# Altium PCB PCB.PcbDoc
Units mm, origin at the board's own origin, x right, y up, seen from the top; angles counter-clockwise.
Board outline 53.59 x 68.71 mm, 2 copper layers (Top Layer, Bottom Layer), stack 1.571 mm thick; 57 components, 52 nets, 216 pads, 188 vias.
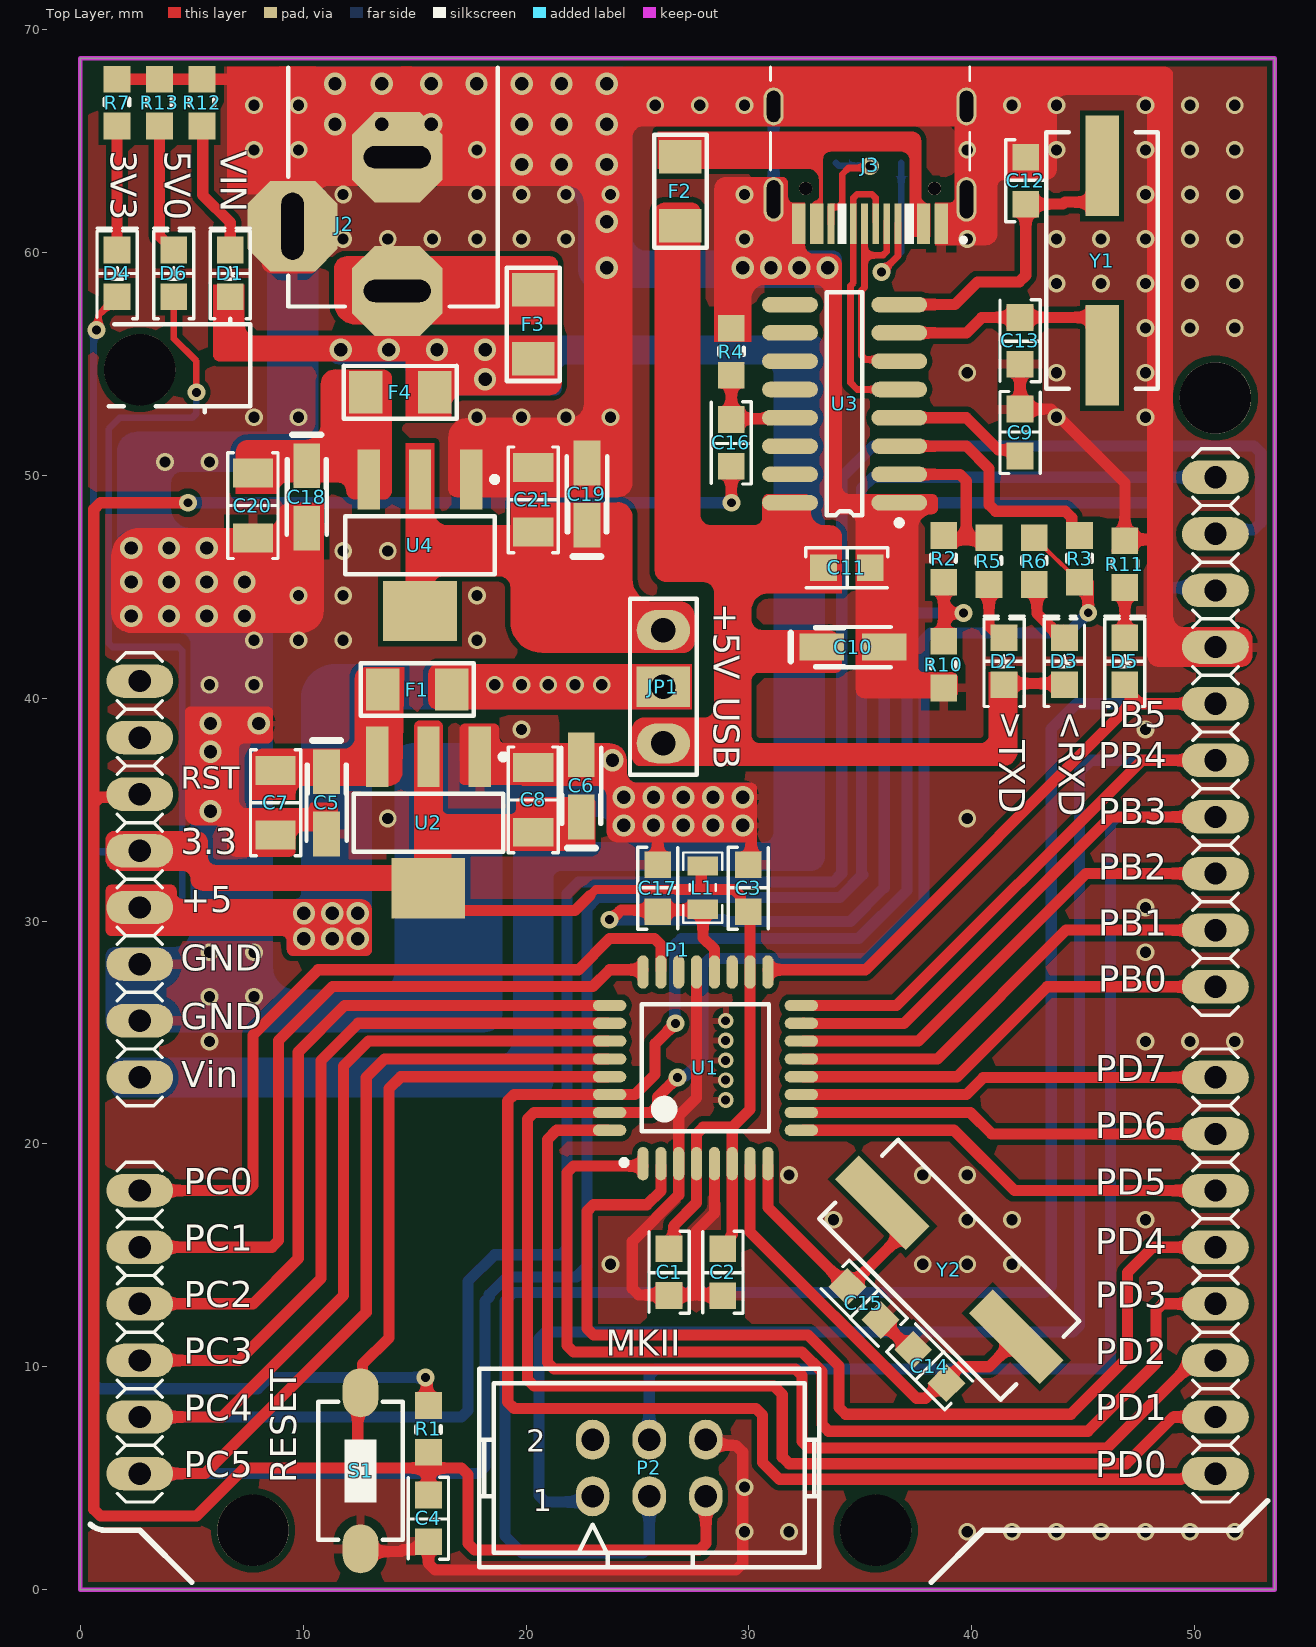
[diagram p0: Top Layer view]
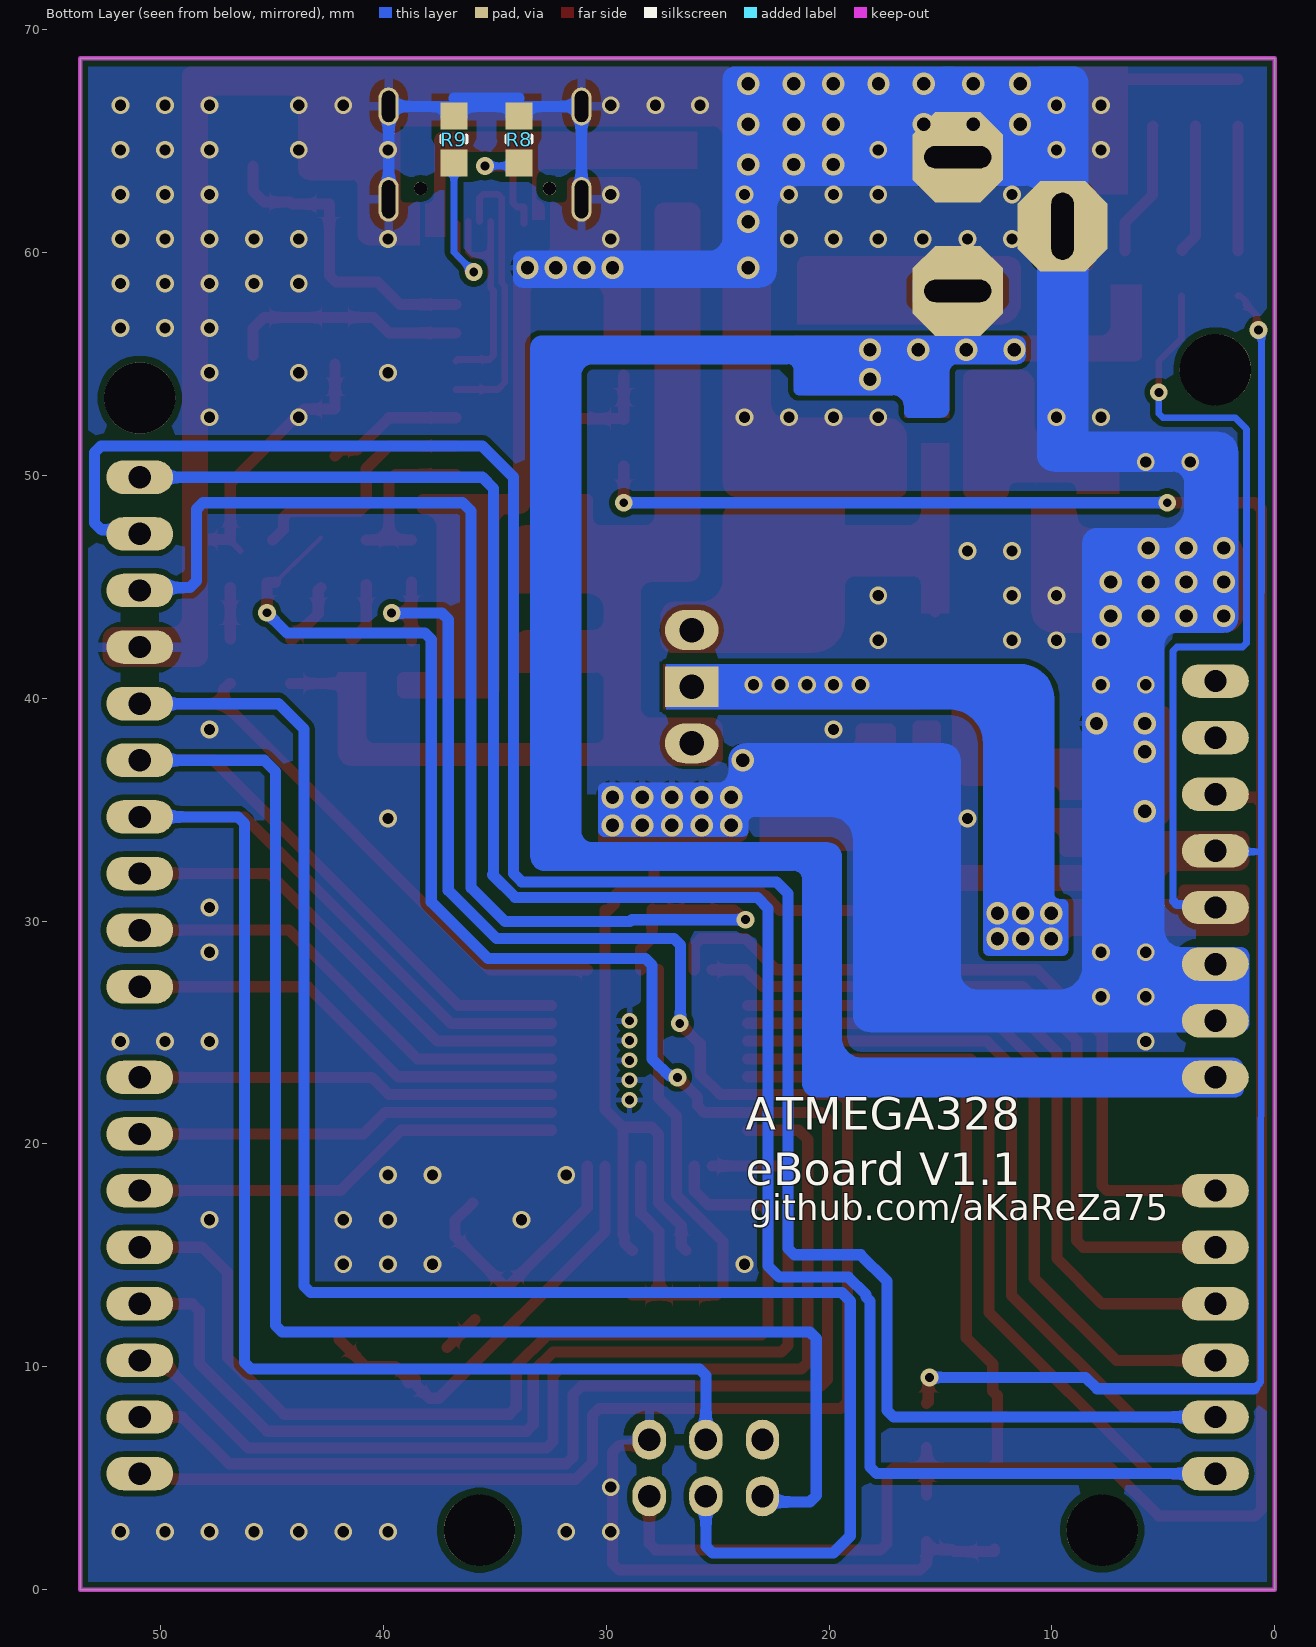
[diagram p1: Bottom Layer view, seen from below]

## Layer stack, top to bottom
Top Solder: solder mask 0.0102, Solder Resist, Dk 3.5
Top Layer: signal copper 0.0356
Dielectric 1: dielectric 1.5, FR-4, Dk 4.8
Bottom Layer: signal copper 0.0356
Bottom Solder: solder mask 0.0102, Solder Resist, Dk 3.5

## Board outline
0,0 0,68.707 53.594,68.707 53.594,0

## Design rules (kind name [scope] priority, off if disabled: settings)
AcuteAngle [All] p1: minimum=6.00000000000000E+0001 checktracksonly=TRUE
AssemblyTestPointUsage [All] p1 off:
AssemblyTestpoint [All] p1 off: testpointundercomponent=TRUE minsize=1.016 maxsize=2.54 preferedsize=1.524 minholesize=0 maxholesize=1.016 preferedholesize=0.813 testpointgrid=0.025 usegrid=TRUE gridtolerance=0 allowsidetop=TRUE allowsidebottom=TRUE
BoardOutlineClearance [All] p1: gap=0.2 ignorepadtopadclearanceinfootprint=FALSE
Clearance Poly_Clearance [All vs InPolygon] p1: gap=0.25 ignorepadtopadclearanceinfootprint=TRUE except(0.3: Arc-Hole Track-Hole SMDPad-Hole THPad-Hole Via-Hole Fill-Hole Poly-Hole Region-Hole Text-Hole)
Clearance [All] p2: gap=0.2 ignorepadtopadclearanceinfootprint=FALSE except(0.3: Arc-Hole Track-Hole SMDPad-Hole THPad-Hole Via-Hole Fill-Hole Poly-Hole Region-Hole Text-Hole)
FabricationTestPointUsage [All] p1 off: valid=0 allowmultiple=FALSE
FabricationTestpoint [All] p1 off: side=3 testpointundercomponent=TRUE minsize=1.016 maxsize=2.54 preferedsize=1.524 minholesize=0 maxholesize=1.016 preferedholesize=0.813 testpointgrid=0.025 allowsidetop=TRUE allowsidebottom=TRUE usegrid=TRUE gridtolerance=0
HoleSize [All] p1: absolutevalues=TRUE maxlimit=10 minlimit=0.4 maxpercent=80.000 minpercent=20.000
HoleToHoleClearance [All] p1: gap=0.3 allowstackedmicrovias=TRUE
MinimumAnnularRing [All] p1: minimumring=0.15
MinimumSolderMaskSliver [All] p1: minsoldermaskwidth=0.01
PolygonConnect [All] p1: thpad.connectstyle=Relief thpad.reliefconductorwidth=0.4 thpad.reliefentries=4 thpad.polygonreliefangle="90 Angle" thpad.airgapwidth=0.4 smdpad.connectstyle=Relief smdpad.reliefconductorwidth=0.4 smdpad.reliefentries=4 smdpad.polygonreliefangle="90 Angle" smdpad.airgapwidth=0.4 via.connectstyle=Direct via.reliefconductorwidth=0.254 via.reliefentries=4 via.polygonreliefangle="90 Angle" via.airgapwidth=0.254
RoutingVias [All] p1: holewidth=0.4 width=0.7 viastyle="Through Hole" minholewidth=0.4 minwidth=0.7 maxholewidth=3 maxwidth=6
SilkToSilkClearance [All] p1: silktosilkclearance=0
SilkToSolderMaskClearance [IsPad] p1: minsilkscreentomaskgap=0.01 clearancetoexposedcopper=TRUE
SolderMaskExpansion [All] p1: expansion=0.102 istentingtop=FALSE
Width [All] p1: maxlimit=10 minlimit=0.2 preferedwidth=0.3
21 further rules are at their usual default settings.

## Classes and differential pairs
component class U_USBtoTTL: C9 C10 C11 C12 C13 C16 D2 D3 F2 J3 R2 R3 R4 R5 R6 R8 R9 R10 U3 Y1
component class U_MicroController: C1 C2 C3 C4 C14 C15 C17 D5 L1 P1 P2 R1 R11 S1 U1 Y2
component class U_Supply: C5 C6 C7 C8 C18 C19 C20 C21 D1 D4 D6 F1 F3 F4 J2 JP1 R7 R12 R13 U2 U4

## Components (designator, comment, footprint, x,y, rotation, side; value= is the part's Value field where it differs from the comment)
C1 "100n" "CAP 0805/2012" 26.416,14.224 r270 top
C2 "100n" "CAP 0805/2012" 28.829,14.216 r270 top
C3 "100n" "CAP 0805/2012" 29.972,31.496 r90 top
C4 "100n" "CAP 0805/2012" 15.621,3.175 r270 top
C5 "10u" SMT_C_Tantalum_A 11.049,35.306 r270 top
C6 "22u" SMT_C_Tantalum_A 22.479,36.068 r90 top
C7 "100n" "CAP 1206/3216" 8.763,35.306 r270 top
C8 "100n" "CAP 1206/3216" 20.32,35.433 r90 top
C9 "10n" "CAP 0805/2012" 42.164,51.943 r90 top
C10 "10u" SMT_C_Tantalum_A 34.671,42.291 r0 top
C11 "100n" "CAP 0805/2012" 34.417,45.847 r0 top
C12 "22p" "CAP 0805/2012" 42.418,63.237 r90 top
C13 "22p" "CAP 0805/2012" 42.164,56.007 r270 top
C14 "22p" "CAP 0805/2012" 38.1,10.033 r135 top
C15 "22p" "CAP 0805/2012" 35.179,12.827 r315 top
C16 "100n" "CAP 0805/2012" 29.21,51.427 r270 top
C17 "100n" "CAP 0805/2012" 25.908,31.496 r90 top
C18 "10u" SMT_C_Tantalum_A 10.16,49.022 r270 top
C19 "22u" SMT_C_Tantalum_A 22.733,49.149 r90 top
C20 "100n" "CAP 1206/3216" 7.747,48.641 r270 top
C21 "100n" "CAP 1206/3216" 20.32,48.895 r90 top
D1 "Yellow" "LED 0805/2012 YELLOW" 6.731,59.055 r90 top
D2 "RED" "LED 0805/2012 RED" 41.444,41.656 r90 top value=Red
D3 "RED" "LED 0805/2012 RED" 44.154,41.656 r90 top value=Red
D4 "Green" "LED 0805/2012 GREEN" 1.651,59.055 r90 top
D5 "Green" "LED 0805/2012 GREEN" 46.863,41.656 r90 top
D6 "Red" "LED 0805/2012 RED" 4.191,59.055 r90 top
F1 "0.5A" 1206_F 15.113,40.386 r180 top
F2 "500m" 1206_F 26.924,62.738 r270 top
F3 "3A" 1206_F 20.32,56.769 r270 top
F4 "0.5A" 1206_F 14.351,53.721 r180 top
J2 "Female" "Power Jack BIG" 14.224,72.771 r270 top
J3 "12b" "HRO_TYPE-C-31-M-12 - Extended" 35.433,66.548 r180 top
JP1 "0b" "jumper selector" 26.162,43.053 r270 top
L1 "100u" IND0805 27.929,31.498 r270 top
P1 "UNO" ARDUINO_UNO_CONNECTOR 2.667,54.737 r270 top locked
P2 "3x2" IDC_2X3 25.527,5.461 r0 top
R1 "10K" "RES 0805 (2012X06L)" 15.621,6.366 r90 top
R2 "1K" "RES 0805 (2012X06L)" 38.735,47.101 r270 top
R3 "1K" "RES 0805 (2012X06L)" 44.831,47.101 r270 top
R4 "10K" "RES 0805 (2012X06L)" 29.21,56.391 r270 top
R5 "680" "RES 0805 (2012X06L)" 40.767,46.999 r270 top
R6 "680" "RES 0805 (2012X06L)" 42.799,46.999 r270 top
R7 "220b" "RES 0805 (2012X06L)" 1.651,67.564 r270 top
R8 "4.7K" "RES 0805 (2012X06L)" 33.909,65.913 r270 bottom
R9 "4.7K" "RES 0805 (2012X06L)" 36.83,65.913 r270 bottom
R10 "1.8K" "RES 0805 (2012X06L)" 38.735,40.656 r90 top
R11 "1k" "RES 0805 (2012X06L)" 46.863,46.863 r270 top value=1K
R12 "1.8k" "RES 0805 (2012X06L)" 5.461,67.564 r270 top value=1.8K
R13 "680b" "RES 0805 (2012X06L)" 3.556,67.564 r270 top
S1 "PB" SW_PB_SMD_2PIN_SPST_6X3X2 12.573,5.334 r90 top
U1 "ATmega328P" ATMEGA328 28.048,23.413 r90 top
U2 "3.3V" SOT223_M 15.621,34.417 r270 top
U3 "CH340G" SO16_M 34.29,53.213 r180 top
U4 "5V" SOT223_M 15.24,46.863 r270 top
Y1 "12M" "Crystal SMD" 45.847,59.631 r270 top
Y2 "12M" "Crystal SMD" 38.989,14.351 r135 top

## Footprints (in the part's own frame and the unit in brackets; to place one, negate y for a bottom-side part, rotate by r counter-clockwise, add the part's x,y. Pads: shape width x height; smd on the part's side, far side on the other; paste and mask are expansions set on the pad)
1206_F [mm] "Surface mount FUSE 1206"
  rect 1.5x1.9 smd: 1(-1.55,0) 2(1.55,0)
  silkscreen extent -2.54,-1.18 2.54,1.18, body extent -2.64,-1.28 2.64,1.29, height 0.71
ARDUINO_UNO_CONNECTOR [mm] "Arduino Uno Connector"
  oval 1.5x3 hole 1: AD1(36.83,0) AD2(39.37,0) AD3(41.91,0) AD4(44.45,0) AD5(46.99,0) AD6(49.53,0) IOH1(27.686,48.26) IOH2(25.146,48.26) IOH3(22.606,48.26) IOH4(20.066,48.26) IOH5(17.526,48.26) IOH6(14.986,48.26) IOH7(12.446,48.26) IOH8(9.906,48.26) IOH9(7.366,48.26) IOH10(4.826,48.26) IOL1(49.53,48.26) IOL2(46.99,48.26) IOL3(44.45,48.26) IOL4(41.91,48.26) IOL5(39.37,48.26) IOL6(36.83,48.26) IOL7(34.29,48.26) IOL8(31.75,48.26) POW1(13.97,0) POW2(16.51,0) POW3(19.05,0) POW4(21.59,0) POW5(24.13,0) POW6(26.67,0) POW7(29.21,0) POW8(31.75,0)
  round 3.2 hole 3.2: H1(0,0) H2(52.07,5.08) H3(52.07,33.02) H4(1.27,48.26)
  silkscreen extent 3.56,-2.21 54.41,50.6, body extent -1.7,-2.34 54.54,50.73, height 1.27
ATMEGA328 [mm] "Thin QFP, 32-Leads, Body 7x7mm, Pitch 0.8mm, IPC Low Density"
  oval 1.5x0.5 smd: 1(-4.301,2.8) 2(-4.301,2) 3(-4.301,1.2) 4(-4.301,0.4) 5(-4.301,-0.4) 6(-4.301,-1.2) 7(-4.301,-2) 8(-4.301,-2.8) 17(4.301,-2.8) 18(4.301,-2) 19(4.301,-1.2) 20(4.301,-0.4) 21(4.301,0.4) 22(4.301,1.2) 23(4.301,2) 24(4.301,2.8)
  oval 0.5x1.5 smd: 9(-2.8,-4.301) 10(-2,-4.301) 11(-1.2,-4.301) 12(-0.4,-4.301) 13(0.4,-4.301) 14(1.2,-4.301) 15(2,-4.301) 16(2.8,-4.301) 25(2.8,4.301) 26(2,4.301) 27(1.2,4.301) 28(0.4,4.301) 29(-0.4,4.301) 30(-1.2,4.301) 31(-2,4.301) 32(-2.8,4.301)
  silkscreen extent -4.37,-2.85 2.85,3.77, body extent -5.75,-5.75 5.75,5.75, height 1.2
"CAP 0805/2012" [mm] "Chip Capacitor, 2-Leads, Body 2.00x1.20mm, IPC Medium Density"
  rect 1.2x1.2 smd: 1(-1.075,0) 2(1.025,0)
  silkscreen extent -1.86,-0.9 1.82,0.9, body extent -1.94,-0.97 1.89,0.98, height 1.15
"CAP 1206/3216" [mm] "Chip Capacitor, 2-Leads, Body 3.25x1.60mm, IPC Medium Density"
  rect 1.3x1.8 smd: 1(-1.45,0) 2(1.45,0)
  silkscreen extent -2.37,-1.12 2.37,1.12, body extent -2.45,-1.2 2.45,1.2, height 1.6
"Crystal SMD" [mm] "DESIGNER ABBAS BASEREH"
  rect 4.5x1.5 smd: 1(-4.25,0) 2(4.25,0)
  silkscreen extent -5.75,-2.5 5.75,2.5, body extent -6.9,-2.8 6.9,2.8, height 4
"HRO_TYPE-C-31-M-12 - Extended" [mm]
  rect 0.6x1.8 smd mask+0.05: A1_B12(-3.2,5.264) A4_B9(-2.4,5.264) B1_A12(3.2,5.264) B4_A9(2.4,5.264)
  rect 0.3x1.8 smd mask+0.05: A5(-1.25,5.264) A6(-0.25,5.264) A7(0.25,5.264) B5(1.75,5.264) B6(0.75,5.264) B7(-0.75,5.264)
  oval 0.9x2 hole 0.6 slot 1.7 at 90 deg: S1(-4.325,4.17) S2(4.325,4.17)
  oval 0.9x1.7 hole 0.6 slot 1.4 at 90 deg: S3(-4.325,0) S4(4.325,0)
  round 0.6 hole 0.6 unplated: ""(-2.89,3.68) ""(2.89,3.68)
  silkscreen extent -4.47,-1.77 4.47,6.17, body extent -5.56,-2.87 9.06,6.21, height 3.26
IDC_2X3 [mm] "IDC2X3 FOR PROGPIN AND JUMPER BOX AND ETC. DESIGNER ABBAS BASEREH"
  oval 1.5x1.8 hole 1 mask+0.1: 1(-2.54,-1.27) 2(-2.54,1.27) 3(0,-1.27) 4(0,1.27) 5(2.54,-1.27) 6(2.54,1.27)
  silkscreen extent -7.62,-4.44 7.62,4.44, body extent -7.88,-4.67 7.88,4.68, height 7.62
IND0805 [mm] "Chip Inductor, 2-Leads, Body 2/00x1/25mm, IPC Medium Density DESIGNER:ABBAS BASEREH"
  rect 0.87x1.37 smd: 1(-0.97,0) 2(0.97,0)
  silkscreen extent -1.58,-0.87 1.58,0.87, body extent -1.68,-0.97 1.68,0.98, height 0.5
"jumper selector" [mm]
  oval 1.8x2.4 hole 1.1: 1(0,0) 3(5.08,0)
  rect 1.8x2.4 hole 1.1: 2(2.54,0)
  silkscreen extent -1.4,-1.5 6.48,1.5, body extent -1.5,-1.6 6.58,1.6, height 1.27
"LED 0805/2012 GREEN" [mm] "Chip Diode, 2-Leads, Body 2.00x1.25mm, IPC Medium Density"
  rect 1.2x1.2 smd: 1(-1.05,0) 2(1.05,0)
  silkscreen extent -2.03,-0.9 2.03,0.9, body extent -2.11,-0.97 2.11,0.98, height 0.7
"LED 0805/2012 RED" [mm] "Chip Diode, 2-Leads, Body 2.00x1.25mm, IPC Medium Density"
  rect 1.2x1.2 smd: 1(-1.05,0) 2(1.05,0)
  silkscreen extent -2.03,-0.9 2.03,0.9, body extent -2.11,-0.97 2.11,0.98, height 0.7
"LED 0805/2012 YELLOW" [mm] "Chip Diode, 2-Leads, Body 2.00x1.25mm, IPC Medium Density"
  rect 1.2x1.2 smd: 1(-1.05,0) 2(1.05,0)
  silkscreen extent -2.03,-0.9 2.03,0.9, body extent -2.11,-0.97 2.11,0.98, height 0.7
"Power Jack BIG" [mm] "Power Adaptor Jack"
  oct 4.05x4.05 hole 1 slot 3 at 90 deg: 1(14.5,0) 2(8.5,0)
  oct 4.05x4.05 hole 1 slot 3 at 0 deg: 3(11.6,-4.7)
  Top Layer region: 13.125,-5.7 13.625,-5.2 13.625,-4.2 13.125,-3.7 10.075,-3.7 9.575,-4.2 9.575,-5.2 10.075,-5.7
  Top Layer region: 7.5,-1.525 8,-2.025 9,-2.025 9.5,-1.525 9.5,1.525 9,2.025 8,2.025 7.5,1.525
  Top Layer region: 13.5,-1.525 14,-2.025 15,-2.025 15.5,-1.525 15.5,1.525 15,2.025 14,2.025 13.5,1.525
  Bottom Layer region: 13.125,-5.7 13.625,-5.2 13.625,-4.2 13.125,-3.7 10.075,-3.7 9.575,-4.2 9.575,-5.2 10.075,-5.7
  Bottom Layer region: 7.5,-1.525 8,-2.025 9,-2.025 9.5,-1.525 9.5,1.525 9,2.025 8,2.025 7.5,1.525
  Bottom Layer region: 13.5,-1.525 14,-2.025 15,-2.025 15.5,-1.525 15.5,1.525 15,2.025 14,2.025 13.5,1.525
  silkscreen extent 4.49,-4.9 15.2,4.5, body extent 4.39,-5.8 15.6,4.6, height 1.27
"RES 0805 (2012X06L)" [mm] "Chip Resistor, 2-Leads, Body 2.0x1.3mm, IPC High Density _ (0.100 W)"
  rect 1.2x1.2 smd: 1(-0.2,0) 2(1.9,0)
  silkscreen extent 0.67,-0.55 0.98,0.55, body extent -0.9,-0.8 2.6,0.8, height 0.65
SMT_C_Tantalum_A [mm] "Capacitor, SM Tantalum; Body 3.2 x 1.6 mm (LxW typ)"
  rect 2x1.2 smd: 1(-1.4,0) 2(1.4,0)
  silkscreen extent -2.79,-0.9 1.7,0.9, body extent -2.95,-1.07 2.59,1.07, height 1.8
SO16_M [mm] "16-Pin Small Outline Integrated Circuit 1.27 mm Pitch, IPC Low Density - DESIGNER ABBAS BASEREH"
  oval 2.5x0.7 smd: 1(-2.45,4.445) 2(-2.45,3.175) 3(-2.45,1.905) 4(-2.45,0.635) 5(-2.45,-0.635) 6(-2.45,-1.905) 7(-2.45,-3.175) 8(-2.45,-4.445) 9(2.45,-4.445) 10(2.45,-3.175) 11(2.45,-1.905) 12(2.45,-0.635) 13(2.45,0.635) 14(2.45,1.905) 15(2.45,3.175) 16(2.45,4.445)
  silkscreen extent -2.58,-5 0.8,5.47, body extent -4.25,-5.55 4.25,5.6, height 1.75
SOT223_M [mm] "SOT223, 4-Leads, Body 6.5x3.5mm, Pitch 2.3mm, Lead Span 7mm, IPC Low Density"
  rect 2.7x1 smd: 1(-2.95,2.3) 2(-2.95,0) 3(-2.95,-2.3)
  rect 2.7x3.3 smd: 4(2.95,0)
  silkscreen extent -3.07,-3.35 1.3,3.48, body extent -4.85,-3.9 4.85,3.9, height 1.7
SW_PB_SMD_2PIN_SPST_6X3X2 [mm] "SWITCH, PUSHBUTTON, SMD, SPST, 6X3.5X2.5mm, RS-282G05A3, SKQYPA, 50000 Cycles"
  oval 2.2x1.6 smd mask+0.1: 1(-3.5,0) 2(3.5,0)
  silkscreen extent -3.1,-1.9 3.1,1.9, body extent -4.7,-2 4.7,2, height 5

## Part data
C1 C2 C3 C4 C11 C16 C17: library part Cap_Multi_SMD_100nF_0805, "Bipolar ceramic capacitor SMD", Package=0805, Rating=50V, Inflow=inflow?, Type=MultiLayer, Validation=Valid
C5 C18: library part Cap_Tantalum, "Tantalum Capacitor,TAJ Series-SMD", Package=Package?, Rating=16V, Inflow=inflow?, Type=Tantalum, Validation=Valid
C6 C10 C19: library part Cap_Tantalum, "Tantalum Capacitor,TAJ Series-SMD", Package=Package?, Rating=6.3V, Inflow=inflow?, Type=Tantalum, Validation=Valid
C7 C8 C20 C21: library part Cap_Multi_SMD_100nF_1206, "Bipolar ceramic capacitor SMD", Package=1206, Rating=50V, Inflow=inflow?, Type=MultiLayer, Validation=Valid
C9 C12 C13 C14 C15: library part Cap_Multi_SMD_0805, "Bipolar ceramic capacitor SMD", Package=0805, Rating=Rating?, Inflow=inflow?, Type=MultiLayer, Validation=Valid
D1 D2 D3 D4 D5 D6: library part Semi_LED_SMD, "LED", Package=Package?, Rating=Rating?, Inflow=inflow?, Type=LED, Validation=Valid
F1 F2 F3 F4: library part Other_Elec_Fuse_SMD, "Short circiut  protection", Package=1206, Rating=Rating?, Inflow=inflow?, Type=Fast, Validation=Valid
J2: library part Con_Power_Jack, "Power Jack", Package=Package?, Rating=Rating?, Inflow=6127, Type=Type?, Validation=Valid
J3: library part Con_USB_C, "USB C Female Connector", Package=SMD, Rating=Rating?, Inflow=inflow?, Type=C, Validation=Valid
JP1: library part SW_Other_JSelector_Dip, "Jumper Selector", Package=Dip, Rating=Rating?, Inflow=5145, Type=Selector, Validation=NT
L1: library part Ind_SMD_0805, "Inductor", Package=0805, Rating=Rating?, Inflow=inflow?, Type=SMD, Validation=Valid
P1: library part Con_Arduino_UNO_Con, "Arduino UNO Connector", Package=Package?, Rating=Rating?, Inflow=inflow?, Type=Type?, Validation=NT
P2: library part Con_Prog_MKII_ISP, "6 Pin Standard ISP Header For MKII", Package=Package?, Rating=Rating?, Inflow=inflow?, Type=Type?, Validation=NT
R1 R2 R3 R4 R5 R6 R7 R8 R9 R10 R11 R12 R13: library part Res_SMD_0805, "Resistor", Package=0805, Rating=0.125W, Inflow=inflow?, Type=10%, Validation=Valid
S1: library part SW_PushButton_2_SMD, "SMT Tactile ‎Switch", Package=SMD, Rating=2b, Inflow=8260, Type=Vertical, Validation=Valid
U1: library part IC_MCU_ATmega328P_SMD, "8-Bit AVR Microcontroller with 32K Bytes of In-System Programmable Flash Memory", Package=Package?, Rating=Rating?, Inflow=inflow?, Type=Type?, Validation=Valid
U2 U4: library part IC_Reg_AMS1117_3.3, "1'A Positive voltage regulator", Package=SOT223, Rating=1A, Inflow=5217, Type=LDO, Validation=Valid
U3: library part IC_Converter_CH340G, "TTL To USB Chip", Package=SO-16, Rating=Rating?, Inflow=inflow?, Type="USB to TTL", Validation=Valid
Y1 Y2: library part Other_Elec_Xtal_SMD, "Crystal Oscillator", Package=SMD, Rating=Rating?, Inflow=inflow?, Type=Quartz, Validation=Valid

## Via types
v1: diameter 0.8, hole 0.5, Top Layer to Bottom Layer, tented both sides, 112 vias
v2: diameter 1, hole 0.6, Top Layer to Bottom Layer, tented both sides, 59 vias
v3: diameter 0.8, hole 0.4, Top Layer to Bottom Layer, tented both sides, 12 vias
v4: diameter 0.7, hole 0.4, Top Layer to Bottom Layer, tented both sides, 5 vias

## Nets (pads, with @x,y where several pads share a name; then routed paths per layer and width w, separated by ;. In a path a pad name is that pad's centre, name@x,y a point inside that pad or via, vN(x,y) a via of type N, cw(c..) or ccw(c..) an arc to the next point about the centre after c; other vN are vias at no path point)
+3.3: C1.1 C2.1 C3.1 C6.1 C8.1 D4.1 L1.1 P1.POW4 R1.2 U1.4 U1.6 U1.18 U2.2 U2.4 | length 123.9
  Top Layer w0.3: v3(0.727,56.515) 0.823,56.611 0.823,57.177 1.301,57.655 1.301,57.805 1.551,58.055 D4.1@1.651,58.055
  Top Layer w0.4: 22.864,31.147 23.138,31.421 26.674,31.421 26.681,31.413 26.752,31.413
  Top Layer w0.5: P1.POW4 4.826,33.147 ; v3(15.494,9.525) 15.551,9.468 15.551,8.436 R1.2@15.621,8.366 ; U2.4@15.621,31.417 15.621,33.909 ; U2.4 17.021,30.48 22.197,30.48 22.864,31.147 ; U2.2@15.621,37.617 15.621,33.909 ; C8.1 20.27,34.033 15.745,34.033 15.621,33.909 ; C8.1@20.364,33.983 20.414,34.033 22.186,34.033 22.479,34.326 C6.1@22.479,35.068 ; C1.1@26.416,15.224 26.632,15.44 26.632,16.345 27.648,17.361 27.648,20.453 27.941,20.746 29.248,20.746 ; 26.752,31.413 29.329,31.413 29.622,31.121 29.622,30.771 29.897,30.496 30.048,30.496 U1.18 30.048,21.546 29.248,20.746 ; 27.731,31.419 27.856,31.545 27.856,32.396 L1.1 ; C2.1@28.833,15.216 29.179,15.562 29.179,15.865 29.248,15.934 U1.6 29.248,20.746
  Bottom Layer w0.3: 0.635,9.31 0.615,33.108 0.595,56.285 0.595,56.408 0.69,56.503 v3@0.705,56.516 ; 0.645,33.108 P1.POW4@2.628,33.108 ; 0.656,9.289 0.928,9.017
  Bottom Layer w0.5: 0.928,9.017 7.98,9.017 8.488,9.525 v3(15.494,9.525) ; P1.POW4@2.628,33.108 P1.POW4
+5: D6.1 F1.1 JP1.2 P1.POW5 | length 45.9
  Top Layer w0.3: D6.1@4.191,58.055 4.191,56.134 5.207,55.118 v3(5.207,53.721)
  Top Layer w0.5: F1.1@16.513,40.386 26.035,40.386 JP1.2
  Bottom Layer w0.3: 4.572,30.901 4.572,42.115 4.396,42.291 1.446,42.291 1.27,42.467 1.27,52.07 1.766,52.566 5.032,52.591 5.207,52.766 v3(5.207,53.721)
  Bottom Layer w0.4: P1.POW5 2.8,30.74 4.393,30.74 4.553,30.901
  other v1: 18.594,40.6 19.794,40.6 20.994,40.6 22.194,40.6 23.394,40.6
  other v2: 10.033,29.21 11.303,29.21 12.446,29.21 10.033,30.353 11.303,30.353 12.446,30.353
+5R: C19.1 C21.1 JP1.1 U4.2 U4.4 | length 18.2
  Top Layer w0.5: U4.4@15.24,43.863 15.24,47.244 ; U4.2@15.24,50.063 15.24,47.244 ; 20.32,45.974 C21.1@20.32,47.241 ; C19.1 22.733,47.283 22.44,46.99 20.571,46.99 C21.1@20.32,47.241 ; 23.622,43.053 JP1.1 ; 15.24,47.244 15.243,47.241 C21.1@20.32,47.241
ADC6: U1.19
ADC7: U1.22
ARef: C17.1 L1.2 P1.IOH8 U1.20 | length 55.7
  Top Layer w0.5: v3(23.749,30.06) 23.83,30.06 24.258,30.488 25.9,30.488 25.908,30.496 27.897,30.496 L1.2 27.94,30.518 27.94,29.246 28.448,28.738 U1.20@28.448,27.813
  Bottom Layer w0.5: v3(23.749,30.06) 28.845,30.06 28.933,29.972 34.544,29.972 36.068,31.496 36.068,48.387 36.449,48.768 48.094,48.768 48.387,48.475 48.387,45.251 48.68,44.958 50.8,44.958 P1.IOH8
GND: C1.2 C2.2 C3.2 C4.2 C5.2 C6.2 C7.2 C8.2 C9.2 C10.2 C11.2 C12.2 C13.2 C14.2 C15.2 C17.2 C18.2 C19.2 C20.2 C21.2 J2.2 J2.3 J3.A1_B12 J3.B1_A12 J3.S1 J3.S2 J3.S3 J3.S4 P1.IOH7 P1.POW6 P1.POW7 P2.6 R4.1 R7.1 R8.1 R9.1 R10.1 R11.1 R12.1 R13.1 S1.1 U1.3 U1.5 U1.21 U2.1 U3.1 U4.1 | length 152.5
  Top Layer w0.3: R11.1@46.413,46.613 R11.1 R11.1@46.863,47.101
  Top Layer w0.5: R7.1 R13.1 R12.1 6.931,67.764 7.239,68.072 ; 7.342,63.373 7.342,65.405 ; 7.342,67.437 7.342,65.405 ; C7.2 8.763,33.871 9.671,34.779 9.671,34.814 9.702,34.783 10.699,34.783 10.699,34.738 11.049,34.388 C5.2 ; J2.3 9.524,65.279 9.398,65.405 ; S1.1 12.573,1.707 14.397,1.707 14.49,1.8 15.271,1.8 C4.2 15.621,1.182 15.914,0.889 29.425,0.889 29.718,1.182 29.718,6.184 29.425,6.477 28.067,6.477 P2.6 ; J2.2 12.949,64.271 12.325,64.895 12.198,64.895 12.141,64.952 12.141,64.978 11.848,65.271 11.848,65.278 10.922,65.278 10.795,65.405 9.398,65.405 ; U4.1@17.54,50.063 17.647,50.169 20.32,50.169 20.496,50.345 22.529,50.345 C19.2 ; U2.1@17.921,37.617 17.921,37.299 17.97,37.25 19.953,37.25 C8.2 20.412,36.975 22.386,36.975 C6.2@22.479,37.068 ; C17.2@25.908,32.496 25.908,33.616 26.201,33.909 29.806,33.909 30.099,33.616 30.099,32.623 C3.2@29.972,32.496 ; U1.21@27.648,27.813 27.648,22.06 26.848,21.26 26.848,17.704 24.765,15.621 24.765,13.517 25.058,13.224 26.416,13.224 26.42,13.22 27.622,13.22 ; U1.5@28.448,19.013 28.448,16.891 27.622,16.066 27.622,13.22 ; C2.2@28.829,13.216 28.825,13.22 27.622,13.22 ; C11.2 C11.2@35.817,45.847 ; C15.2@35.886,12.12 C14.2@37.139,10.867 ; C10.2 35.817,42.545 C11.2@35.817,45.847 ; U3.1 35.909,48.768 35.817,48.676 C11.2@35.817,45.847 ; J3.A1_B12@38.633,61.384 38.633,61.01 38.683,60.96 39.458,60.96 39.681,61.183 39.681,62.301 J3.S1 v1@39.758,64.262 ; J3.S3 v1@39.758,64.262 ; C13.2 C9.2 43.552,52.968 46.863,49.657 46.863,47.101 46.879,47.117 48.348,47.117 48.641,46.824 48.641,42.711 48.934,42.418 50.8,42.418 P1.IOH7 ; C12.2 v1@39.758,64.262 ; 7.342,65.405 9.398,65.405
  Bottom Layer w0.5: J3.S2 J3.S4 J3.S3 J3.S1 ; 33.909,66.913 36.83,66.913
  other v1: 29.794,2.6 31.794,2.6 39.794,2.6 41.794,2.6 43.794,2.6 45.794,2.6 47.794,2.6 49.794,2.6 51.794,2.6 29.794,4.6 23.794,14.6 37.794,14.6 39.794,14.6 41.794,14.6 33.794,16.6 39.794,16.6 41.794,16.6 47.794,16.6 31.794,18.6 37.794,18.6 39.794,18.6 5.794,24.6 47.794,24.6 49.794,24.6 51.794,24.6 5.794,26.6 7.794,26.6 5.794,28.6 7.794,28.6 47.794,28.6 47.794,30.6 13.794,34.6 39.794,34.6 19.794,38.6 47.794,38.6 5.794,40.6 7.794,40.6 7.794,42.6 9.794,42.6 11.794,42.6 17.794,42.6 9.794,44.6 11.794,44.6 17.794,44.6 11.794,46.6 13.794,46.6 3.794,50.6 5.794,50.6 7.794,52.6 9.794,52.6 17.794,52.6 19.794,52.6 21.794,52.6 23.794,52.6 43.794,52.6 47.794,52.6 39.794,54.6 43.794,54.6 47.794,54.6 47.794,56.6 49.794,56.6 51.794,56.6 43.794,58.6 45.794,58.6 47.794,58.6 49.794,58.6 51.794,58.6 11.794,60.6 13.794,60.6 15.794,60.6 17.794,60.6 19.794,60.6 21.794,60.6 29.794,60.6 39.794,60.6 43.794,60.6 45.794,60.6 47.794,60.6 49.794,60.6 51.794,60.6 11.794,62.6 17.794,62.6 19.794,62.6 21.794,62.6 23.794,62.6 29.794,62.6 47.794,62.6 49.794,62.6 51.794,62.6 7.794,64.6 9.794,64.6 17.794,64.6 39.794,64.6 43.794,64.6 47.794,64.6 49.794,64.6 51.794,64.6 7.794,66.6 9.794,66.6 25.794,66.6 27.794,66.6 29.794,66.6 41.794,66.6 43.794,66.6 47.794,66.6 49.794,66.6 51.794,66.6
  other v2: 24.384,34.29 25.717,34.29 27.051,34.29 28.384,34.29 29.718,34.29 5.842,34.925 24.384,35.56 25.717,35.56 27.051,35.56 28.384,35.56 29.718,35.56 23.876,37.211 5.842,37.592 5.842,38.862 8.001,38.862 2.286,43.688 3.979,43.688 5.673,43.688 7.366,43.688 2.286,45.212 3.979,45.212 5.673,45.212 7.366,45.212 2.286,46.736 3.979,46.736 5.673,46.736 23.622,59.309 29.718,59.309 30.988,59.309 32.258,59.309 33.528,59.309 23.622,61.373 19.812,63.944 21.59,63.944 23.622,63.944 11.43,65.754 13.525,65.754 15.748,65.754 19.812,65.754 21.59,65.754 23.622,65.754 11.43,67.564 13.525,67.564 15.748,67.564 17.78,67.564 19.812,67.564 21.59,67.564 23.622,67.564
  other v4: 28.956,21.971 28.956,22.86 28.956,23.749 28.956,24.638 28.956,25.527
NetC5_1: C5.1 C7.1 F1.2 U2.3 | length 8.3
  Top Layer w0.5: C7.1 10.999,36.756 C5.1 11.049,36.579 12.748,36.579 13.321,37.152 13.321,37.617 13.417,37.713 13.417,40.09 F1.2@13.713,40.386
NetC9_1: C9.1 U3.4 | length 6.1
  Top Layer w0.5: U3.4 39.751,52.578 41.182,51.147 41.885,51.147 C9.1
NetC12_1: C12.1 U3.8 Y1.1 | length 14.2
  Top Layer w0.5: U3.8 37.344,57.658 39.243,57.658 40.259,58.674 42.125,58.674 42.418,58.967 C12.1 44.097,62.162 44.188,62.253 45.347,62.253 45.847,62.753 Y1.1
NetC13_1: C13.1 U3.7 Y1.2 | length 10.8
  Top Layer w0.5: U3.7 37.344,56.388 39.751,56.388 40.445,57.082 C13.1 45.347,57.082 45.847,56.582 Y1.2
NetC16_1: C16.1 R4.2 U3.13 | length 4.6
  Top Layer w0.5: R4.2 C16.1 29.248,52.54 31.802,52.54 U3.13
NetC18_1: C18.1 C20.1 F4.2 U4.3 | length 9.6
  Top Layer w0.5: C20.1 7.924,50.091 9.829,50.091 C18.1 10.16,50.052 12.929,50.052 U4.3@12.94,50.063 ; U4.3 U4.3@12.94,50.063 ; F4.2@12.951,53.721 12.946,53.716 12.946,50.069 U4.3@12.94,50.063
NetD1_2: D1.2 R12.2 | length 6.1
  Top Layer w0.5: R12.2 5.492,65.633 5.492,62.58 6.731,61.341 D1.2@6.731,60.055
NetD2_2: D2.2 R5.2 | length 2.8
  Top Layer w0.5: R5.2 40.767,44.963 40.767,43.233 41.344,42.656 D2.2@41.444,42.656
NetD3_2: D3.2 R6.2 | length 2.9
  Top Layer w0.5: R6.2@42.799,44.963 42.915,44.847 42.915,43.794 44.054,42.656 D3.2@44.154,42.656
NetD4_2: D4.2 R7.2 | length 5.6
  Top Layer w0.5: D4.2@1.651,60.055 R7.2
NetD5_2: D5.2 R11.2 | length 2.3
  Top Layer w0.5: D5.2@46.863,42.656 R11.2
NetD6_2: D6.2 R13.2 | length 5.8
  Top Layer w0.5: R13.2 3.556,60.74 4.154,60.142 D6.2@4.154,60.092
NetF2_1: F2.1 J3.A4_B9 J3.B4_A9
NetF3_1: F3.1 J2.1 | length 6.1
  Top Layer w0.5: J2.1 14.28,58.215 20.274,58.215 F3.1@20.32,58.169
NetJ3_A5: J3.A5 R9.2 | length 7.8
  Top Layer w0.3: v3(35.941,59.116) 35.964,59.116 36.683,59.834 J3.A5
  Bottom Layer w0.3: v3(35.941,59.116) 36.83,60.005 R9.2
NetJ3_A6: J3.A6 J3.B6 U3.5 | length 12.8
  Top Layer w0.3: J3.A6@35.683,61.384 35.683,62.435 35.507,62.611 34.859,62.611 34.683,62.435 34.683,58.631 34.552,58.5 34.552,54.155 34.859,53.848 U3.5
NetJ3_A7: J3.A7 J3.B7 U3.6 | length 10.3
  Top Layer w0.3: J3.A7@35.183,61.384 35.183,59.866 ; 35.993,59.866 35.183,59.866 ; 35.994,59.866 35.997,59.867 36,59.868 36.004,59.87 36.009,59.873 36.016,59.877 36.025,59.884 36.04,59.898 36.183,60.041 J3.B7@36.183,61.384 ; U3.6 36.663,55.195 35.228,55.195 35.052,55.37 35.052,58.293 35.183,58.424 35.183,59.866
NetJ3_B5: J3.B5 R8.2 | length 5.6
  Top Layer w0.3: J3.B5 33.683,62.034 34.007,62.034 34.183,62.209 34.183,63.503 34.466,63.785 35.337,63.785 v3(35.433,63.881)
  Bottom Layer w0.3: R8.2 34.041,63.881 v3(35.433,63.881)
NetR2_1: R2.1 R5.1 U3.2 | length 7.8
  Top Layer w0.5: U3.2 37.344,50.038 39.458,50.038 39.751,49.745 39.751,47.101 ; R2.1@38.735,47.101 39.751,47.101 ; R5.1@40.767,47.101 39.751,47.101
NetR3_1: R3.1 U3.3 | length 11.2
  Top Layer w0.5: U3.3 37.344,51.308 39.751,51.308 40.767,50.292 40.767,48.68 41.06,48.387 44.188,48.387 44.481,48.094 44.481,47.566 R3.1@44.958,47.089
PB0: P1.IOH1 U1.12 | length 20.2
  Top Layer w0.5: U1.12@32.448,23.013 39.338,23.013 43.376,27.051 P1.IOH1
PB1: P1.IOH2 U1.13 | length 20.9
  Top Layer w0.5: U1.13@32.448,23.813 38.456,23.813 44.234,29.591 P1.IOH2
PB2: P1.IOH3 U1.14 | length 21.6
  Top Layer w0.5: U1.14@32.448,24.613 37.598,24.613 45.116,32.131 P1.IOH3
PB3: P1.IOH4 P2.4 U1.15 | length 75.1
  Top Layer w0.5: U1.15@32.448,25.413 32.461,25.4 36.957,25.4 46.228,34.671 P1.IOH4
  Bottom Layer w0.5: P2.4 25.527,9.613 25.82,9.906 45.935,9.906 46.228,10.199 46.228,34.378 46.521,34.671 P1.IOH4
PB4: P1.IOH5 P2.1 U1.16 | length 88.4
  Top Layer w0.5: U1.16@32.448,26.213 36.627,26.213 47.625,37.211 P1.IOH5
  Bottom Layer w0.5: P2.1 22.733,3.937 20.867,3.937 20.574,4.23 20.574,11.264 20.867,11.557 44.538,11.557 44.831,11.85 44.831,36.703 45.339,37.211 P1.IOH5
PB5: D5.1 P1.IOH6 P2.3 U1.17 | length 103.4
  Top Layer w0.5: U1.17@30.848,27.813 35.218,27.813 47.156,39.751 ; D5.1@46.863,40.656 46.906,40.656 47.156,40.406 47.156,39.751 ; P1.IOH6 47.156,39.751
  Bottom Layer w0.5: P2.3 25.527,3.937 25.527,1.944 25.234,1.651 19.812,1.651 19.05,2.413 19.05,12.954 19.431,13.335 43.268,13.335 43.561,13.628 43.561,38.608 44.704,39.751 P1.IOH6
PB6: C14.1 U1.7 Y2.1 | length 19.5
  Top Layer w0.5: U1.7@30.048,19.013 30.048,16.053 37.512,8.589 37.926,8.589 38.553,9.216 38.553,9.453 C14.1@38.907,9.453 ; C14.1 38.907,9.319 C14.1@38.907,9.453 ; Y2.1 41.994,11.223 40.773,10.001 39.455,10.001 C14.1@38.907,9.453
PB7: C15.1 U1.8 Y2.2 | length 12.1
  Top Layer w0.5: U1.8@30.848,19.013 30.848,17.158 34.472,13.534 36.785,15.848 36.785,16.555 Y2.2
PC0: P1.AD1 U1.23 | length 33.2
  Top Layer w0.5: P1.AD1 7.524,17.907 7.747,18.13 7.747,24.892 10.668,27.813 22.352,27.813 23.749,29.21 25.755,29.21 26.048,28.917 U1.23@26.048,27.813
PC1: P1.AD2 U1.24 | length 33
  Top Layer w0.5: P1.AD2 8.597,15.367 8.89,15.66 8.89,24.638 11.307,27.055 22.991,27.055 23.749,27.813 U1.24@25.248,27.813
PC2: P1.AD3 U1.25 | length 32
  Top Layer w0.5: P1.AD3 7.747,12.827 9.779,14.859 9.779,24.13 11.862,26.213 U1.25@23.648,26.213
PC3: P1.AD4 U1.26 | length 33
  Top Layer w0.5: P1.AD4 7.112,10.287 10.795,13.97 10.795,23.749 12.459,25.413 U1.26@23.648,25.413
PC4: P1.AD5 P1.IOH9 U1.27 | length 131
  Top Layer w0.5: P1.AD5 6.35,7.747 11.811,13.208 11.811,23.495 12.929,24.613 U1.27@23.648,24.613
  Bottom Layer w0.5: P1.AD5 17.106,7.747 17.399,8.04 17.399,13.843 18.581,15.025 21.551,15.025 21.844,15.318 21.844,31.242 22.352,31.75 33.787,31.75 34.163,32.126 34.163,49.911 35.56,51.308 52.666,51.308 52.959,51.015 52.959,47.855 52.666,47.562 51.118,47.562 P1.IOH9
PC5: P1.AD6 P1.IOH10 U1.28 | length 125.6
  Top Layer w0.5: P1.AD6 5.588,5.207 12.827,12.446 12.827,22.987 13.653,23.813 U1.28@23.648,23.813
  Bottom Layer w0.5: P1.AD6 17.868,5.207 18.161,5.5 18.161,12.952 18.35,13.141 18.35,13.244 19.141,14.035 22.251,14.035 22.733,14.517 22.733,30.568 23.215,31.05 34.077,31.05 35.104,32.077 ; 35.052,32.129 35.052,49.405 35.558,49.911 P1.IOH10
PD0: P1.IOL1 R2.2 R10.2 U1.30 | length 91.1
  Top Layer w0.5: v3(26.701,25.411) 25.781,24.491 25.781,23.114 24.88,22.213 23.648,22.213 19.47,22.213 19.177,21.92 19.177,8.421 19.47,8.128 30.314,8.128 30.607,7.835 30.607,5.715 31.369,4.953 49.384,4.953 49.447,5.016 50.736,5.016 P1.IOL1 ; R10.2 38.735,43.815 ; R2.2 38.735,43.815 ; v3(39.624,43.815) 38.735,43.815
  Bottom Layer w0.5: v3(26.701,25.411) 26.67,25.442 26.67,28.917 26.963,29.21 34.925,29.21 37.084,31.369 37.084,43.522 37.377,43.815 v3(39.624,43.815)
PD1: P1.IOL2 R3.2 R6.1 U1.31 | length 95.4
  Top Layer w0.2: R6.1 43.299,46.699 44.331,45.701 R3.2
  Top Layer w0.5: v3(26.797,22.987) 25.908,22.098 25.908,21.717 25.604,21.413 20.359,21.413 20.066,21.12 20.066,9.437 20.359,9.144 31.115,9.144 31.496,8.763 31.496,5.946 31.789,5.653 46.928,5.653 49.022,7.747 P1.IOL2 ; R3.2 44.836,45.196 45.221,45.196 v3(45.221,43.83)
  Bottom Layer w0.5: v3(26.797,22.987) 26.854,23.044 27.165,23.044 27.94,23.819 27.94,28.028 28.233,28.321 35.306,28.321 37.846,30.861 37.846,42.633 38.139,42.926 44.317,42.926 v3(45.221,43.83)
PD2: P1.IOL3 U1.32 | length 47.8
  Top Layer w0.5: U1.32@23.648,20.613 21.375,20.613 20.955,20.193 20.955,10.199 21.248,9.906 32.092,9.906 32.385,9.613 32.385,6.646 32.678,6.353 46.065,6.353 49.999,10.287 P1.IOL3
PD3: P1.IOL4 U1.1 | length 47.1
  Top Layer w0.5: U1.1@25.248,19.013 22.137,19.013 21.844,18.72 21.844,10.961 22.137,10.668 32.385,10.668 33.274,9.779 33.274,7.405 33.567,7.112 45.212,7.112 48.26,10.16 48.26,12.534 48.553,12.827 P1.IOL4
PD4: P1.IOL5 U1.2 | length 46.3
  Top Layer w0.5: U1.2@26.048,19.013 26.048,17.894 25.426,17.272 23.026,17.272 22.733,16.979 22.733,11.723 23.026,11.43 32.639,11.43 34.036,10.033 34.036,8.167 34.329,7.874 44.45,7.874 46.99,10.414 46.99,14.224 48.133,15.367 P1.IOL5
PD5: P1.IOL6 U1.9 | length 19.6
  Top Layer w0.5: U1.9@32.448,20.613 39.204,20.613 41.91,17.907 P1.IOL6
PD6: P1.IOL7 U1.10 | length 18.9
  Top Layer w0.5: U1.10@32.448,21.413 39.928,21.413 40.894,20.447 P1.IOL7
PD7: P1.IOL8 U1.11 | length 18.8
  Top Layer w0.5: U1.11@32.448,22.213 32.46,22.225 39.751,22.225 40.513,22.987 P1.IOL8
Reset: C4.1 C16.2 P1.POW3 P2.5 R1.1 S1.2 U1.29 | length 141.4
  Top Layer w0.5: P1.POW3 2.54,35.56 0.899,35.56 0.606,35.267 ; v3(4.826,48.768) 0.899,48.768 0.606,48.475 0.606,35.267 ; C4.1 15.621,5.461 ; R1.1@15.621,6.366 15.621,5.461 ; U1.29@23.648,23.013 14.377,23.013 13.843,22.479 13.843,11.303 12.656,10.116 12.656,8.917 S1.2 12.446,8.707 12.446,5.754 12.739,5.461 ; P2.5 28.067,3.937 28.067,2.071 27.774,1.778 17.692,1.778 17.399,2.071 17.399,5.168 17.106,5.461 15.621,5.461 ; v3(29.21,48.768) C16.2 ; 0.606,35.267 0.606,3.595 0.899,3.302 5.207,3.302 7.366,5.461 12.739,5.461 ; 12.739,5.461 15.621,5.461
  Bottom Layer w0.5: v3(4.826,48.768) v3(29.21,48.768)
Vin: D1.1 F3.2 F4.1 P1.POW8
  other v2: 18.161,54.31 11.684,55.626 13.843,55.626 16.002,55.626 18.161,55.626
Vusb: C10.1 C11.1 D2.1 D3.1 F2.2 JP1.3 U3.16 | length 33.9
  Top Layer w0.5: JP1.3 29.425,37.973 29.718,38.266 29.718,41.49 29.591,41.617 29.591,45.3 29.884,45.593 32.636,45.593 C11.1@33.017,45.974 ; F2.2@26.924,61.338 26.797,61.211 26.924,61.084 26.924,48.172 27.217,47.879 ; 30.392,42.164 30.646,42.418 33.144,42.418 C10.1 ; D2.1@41.444,40.656 D3.1@44.154,40.656
pads on no net: J3. P1.H1 P1.H2 P1.H3 P1.H4 P1.POW1 P1.POW2 P2.2 U3.9 U3.10 U3.11 U3.12 U3.14 U3.15

## Polygon pours and split planes (outlines as drawn)
GND on Bottom Layer "GND_L02_P002" (solid, remove dead copper, pour order 2): 53.332,68.317 0.16,68.317 0.16,-0.009 53.586,-0.009
GND on Top Layer "GND_L01_P000" (solid, remove dead copper, pour order 0): 53.34,68.326 0.168,68.326 0.168,0 53.594,0

## Keep-outs
Keep-Out Layer:
  the board outline again, w0.2

## Other copper
Top Layer:
  region net NetF2_1: 33.655,64.516 36.83,64.516 cw(c36.83,64.135) 37.211,64.135 37.211,60.706 38.123,60.706 38.123,62.173 cw(c38.123,62.577) 37.719,62.577 37.719,65.024 ccw(c37.338,65.024) 37.338,65.405 25.908,65.405 25.908,63.754 32.639,63.754 cw(c32.639,63.246) 33.147,63.246 33.147,62.484 cw(c32.999,62.484) 33.04,62.342 ccw(c33.147,61.976) 32.766,61.976 32.766,61.462 33.318,61.462 33.318,64.179 cw(c33.655,64.179)
  region net GND: 44.196,67.056 47.371,67.056 cw(c47.371,66.548) 47.879,66.548 47.879,41.91 ccw(c48.387,41.91) 48.387,41.402 52.07,41.402 ccw(c52.07,41.91) 52.578,41.91 52.578,42.672 ccw(c52.07,42.672) 52.07,43.18 49.53,43.18 cw(c49.53,43.688) 49.022,43.688 49.022,67.945 ccw(c48.641,67.945) 48.641,68.326 6.604,68.326 6.604,62.611 8.128,62.611 8.128,59.563 ccw(c8.636,59.563) 8.636,59.055 10.287,59.055 ccw(c10.287,59.436) 10.668,59.436 10.668,62.484 cw(c11.176,62.484) 11.176,62.992 21.209,62.992 21.844,62.992 cw(c21.844,62.23) 22.606,62.23 22.606,53.213 cw(c21.971,53.213) 21.971,52.578 17.399,52.578 ccw(c17.399,51.689) 16.51,51.689 16.51,49.403 ccw(c16.891,49.403) 16.891,49.022 24.13,49.022 ccw(c24.13,49.657) 24.765,49.657 24.765,65.151 cw(c25.273,65.151) 25.273,65.659 39.243,65.659 39.243,62.484 cw(c38.989,62.484) 38.989,62.23 38.354,62.23 38.354,60.325 40.64,60.325 ccw(c40.64,60.833) 41.148,60.833 41.148,62.992 cw(c41.402,62.992) 41.402,63.246 43.307,63.246 ccw(c43.307,63.754) 43.815,63.754 43.815,66.675 cw(c44.196,66.675)
  region net GND: 4.699,34.798 ccw(c5.207,34.798) 5.207,34.29 6.096,34.29 cw(c6.096,33.782) 6.604,33.782 6.604,33.274 ccw(c6.985,33.274) 6.985,32.893 9.398,32.893 ccw(c9.398,33.147) 9.652,33.147 9.652,33.655 cw(c10.033,33.655) 10.033,34.036 11.303,34.036 ccw(c11.303,34.29) 11.557,34.29 11.557,35.052 ccw(c11.295,35.052) 11.295,35.314 10.422,35.314 ccw(c10.422,35.189) 10.296,35.188 cw(c10.16,35.188) 10.16,35.052 7.493,35.052 cw(c7.493,35.433) 7.112,35.433 7.112,37.719 cw(c7.366,37.719) 7.366,37.973 8.382,37.973 ccw(c8.382,38.227) 8.636,38.227 8.636,39.37 ccw(c8.382,39.37) 8.382,39.624 4.953,39.624 ccw(c4.953,39.37) 4.699,39.37
  region net GND: 10.922,48.76 10.922,43.942 cw(c9.906,43.942) 9.906,42.926 2.286,42.926 cw(c2.286,43.815) 1.397,43.815 1.397,46.355 cw(c2.667,46.355) 2.667,47.625 8.255,47.625 ccw(c8.255,48.244) 8.874,48.244 cw(c9.39,48.244) 9.39,48.76
  region net +5: 1.143,29.591 ccw(c1.397,29.591) 1.397,29.337 9.017,29.337 cw(c9.017,29.083) 9.271,29.083 ccw(c9.652,29.083) 9.273,29.045 9.271,29.045 9.271,28.702 ccw(c9.525,28.702) 9.525,28.448 12.827,28.448 ccw(c12.827,28.702) 13.081,28.702 13.081,30.48 ccw(c12.573,30.48) 12.573,30.988 4.572,30.988 cw(c4.572,31.242) 4.318,31.242 4.318,31.369 ccw(c4.064,31.369) 4.064,31.623 1.397,31.623 ccw(c1.397,31.369) 1.143,31.369
  region net +3.3: 5.715,32.893 5.715,33.528 ccw(c5.207,33.528) 5.207,34.036 1.524,34.036 ccw(c1.524,33.655) 1.143,33.655 1.143,32.766 ccw(c1.651,32.766) 1.651,32.258 4.572,32.258 cw(c4.572,31.877) 4.953,31.877 ccw(c5.461,31.877) 5.461,31.369 17.225,31.369 17.225,32.512 6.096,32.512 cw(c6.096,32.893)
  region net GND: 17.018,36.322 ccw(c17.223,36.322) 17.223,36.117 19.861,36.117 19.812,36.068 23.114,36.068 cw(c23.114,35.56) 23.622,35.56 23.622,34.036 ccw(c24.13,34.036) 24.13,33.528 30.353,33.528 30.353,35.941 ccw(c30.099,35.941) 30.099,36.195 25.019,36.195 cw(c25.019,36.703) 24.511,36.703 24.511,37.211 ccw(c23.749,37.211) 23.749,37.973 19.05,37.973 cw(c19.05,38.227) 18.796,38.227 18.796,38.608 ccw(c18.542,38.608) 18.542,38.862 17.272,38.862 ccw(c17.272,38.608) 17.018,38.608
  region net Vin: 14.605,52.578 16.637,52.578 16.637,53.086 cw(c17.145,53.086) 17.145,53.594 21.082,53.594 ccw(c21.082,54.102) 21.59,54.102 21.59,56.261 15.24,56.261 ccw(c15.239,55.762) 15.138,56.251 15.139,56.261 7.874,56.261 cw(c7.874,56.769) 7.366,56.769 7.366,58.555 5.969,58.555 5.969,55.372 ccw(c6.223,55.372) 6.223,55.118 14.605,55.118
  region net NetC18_1: 13.97,54.355 13.97,49.294 cw(c13.589,49.294) 13.589,48.913 12.319,48.913 cw(c12.319,49.294) 11.938,49.294 ccw(c11.557,49.294) 11.557,49.675 9.29,49.675 ccw(c9.29,49.275) 8.89,49.275 8.89,49.167 6.985,49.167 6.985,51.054 cw(c7.511,51.054) 7.511,51.58 10.051,51.58 ccw(c10.051,52.324) 10.795,52.324 10.795,54.104 cw(c11.442,54.104) 11.446,54.752 13.588,54.739 cw(c13.586,54.355)
  region net +3.3: 14.986,31.75 16.637,31.75 16.637,32.893 cw(c16.891,32.893) 16.891,33.147 22.86,33.147 ccw(c22.86,33.401) 23.114,33.401 23.114,35.306 ccw(c22.86,35.306) 22.86,35.56 19.812,35.56 ccw(c19.812,35.306) 19.558,35.306 19.558,35.052 cw(c19.304,35.052) 19.304,34.798 16.51,34.798 cw(c16.51,35.052) 16.256,35.052 16.256,38.735 ccw(c16.002,38.735) 16.002,38.989 15.24,38.989 ccw(c15.24,38.735) 14.986,38.735
  region net NetC5_1: 14.527,41.386 12.811,41.386 ccw(c12.811,40.894) 12.319,40.894 12.319,38.227 cw(c11.811,38.227) 11.811,37.719 8.128,37.719 ccw(c8.128,37.211) 7.62,37.211 7.62,35.433 9.652,35.433 9.652,35.687 cw(c10.033,35.687) 10.033,36.068 13.839,36.068 ccw(c13.839,36.677) 14.448,36.667
  region net +5R: 14.605,43.815 15.875,43.815 15.875,45.085 cw(c16.256,45.085) 16.256,45.466 18.796,45.466 cw(c18.796,44.958) 19.304,44.958 19.304,43.434 ccw(c20.701,43.434) 20.701,42.037 27.051,42.037 ccw(c27.051,42.545) 27.559,42.545 27.559,43.688 ccw(c26.924,43.688) 26.924,44.323 25.781,44.323 cw(c25.781,45.339) 24.765,45.339 24.765,48.14 ccw(c24.113,48.14) 24.095,48.791 23.241,48.768 19.304,48.768 19.304,47.789 19.177,47.752 16.51,47.752 cw(c16.51,48.387) 15.875,48.387 15.875,51.435 14.605,51.435 14.605,45.466
  region net +5: 15.621,41.094 15.621,39.878 ccw(c16.002,39.878) 16.002,39.497 27.432,39.497 27.432,41.529 16.056,41.529 ccw(c16.056,41.094)
  region net Vusb: 25.146,36.957 29.464,36.957 41.402,36.957 ccw(c41.402,37.592) 42.037,37.592 42.037,41.156 40.767,41.156 40.767,38.354 cw(c40.386,38.354) 40.386,37.973 30.48,37.973 cw(c30.48,38.354) 30.099,38.354 30.099,40.767 cw(c30.48,40.767) 30.48,41.148 33.909,41.148 ccw(c33.909,41.402) 34.163,41.402 34.163,42.418 ccw(c33.528,42.418) 33.528,43.053 30.607,43.053 cw(c30.607,43.561) 30.099,43.561 30.099,43.942 cw(c30.861,43.942) 30.861,44.704 34.163,44.704 34.163,47.244 ccw(c33.655,47.244) 33.655,47.752 33.401,47.752 cw(c33.401,48.387) 32.766,48.387 32.766,48.895 ccw(c32.512,48.895) 32.512,49.149 30.861,49.149 ccw(c30.861,48.895) 30.607,48.895 30.607,48.133 cw(c30.226,48.133) 30.226,47.752 28.321,47.752 cw(c28.321,48.26) 27.813,48.26 27.813,61.849 ccw(c27.432,61.849) 27.432,62.23 26.216,62.23 ccw(c26.216,61.795) 25.781,61.795 25.781,45.72 ccw(c26.289,45.72) 26.289,45.212 27.94,45.212 cw(c27.94,44.704) 28.448,44.704 28.448,39.624 cw(c27.94,39.624) 27.94,39.116 25.273,39.116 ccw(c25.273,38.608) 24.765,38.608 24.765,37.338 ccw(c25.146,37.338)
  region net GND: 35.179,40.005 39.116,40.005 ccw(c39.116,40.259) 39.37,40.259 39.37,40.894 ccw(c39.108,40.894) 39.108,41.156 37.838,41.156 cw(c37.838,41.402) 37.592,41.402 37.592,41.909 ccw(c37.588,41.909) 37.592,41.91 37.592,47.625 cw(c38.227,47.625) 38.227,48.26 ccw(c38.227,48.514) 38.481,48.514 38.481,48.895 ccw(c38.227,48.895) 38.227,49.149 34.544,49.149 cw(c34.544,49.53) 34.163,49.53 34.163,59.436 ccw(c33.655,59.436) 33.655,59.944 32.893,59.944 cw(c32.893,60.325) 32.512,60.325 32.512,62.23 32.004,62.23 cw(c32.004,62.484) 31.75,62.484 31.75,63.119 ccw(c31.496,63.119) 31.496,63.373 28.956,63.373 ccw(c28.956,62.865) 28.448,62.865 28.448,55.991 30.099,55.991 30.099,57.912 cw(c30.734,57.912) 30.734,58.547 33.02,58.547 cw(c33.02,58.166) 33.401,58.166 33.401,48.768 ccw(c33.909,48.768) 33.909,48.26 34.417,48.26 cw(c34.417,47.879) 34.798,47.879 34.798,41.91 34.798,40.386 ccw(c35.179,40.386)
  region net NetF3_1: 21.082,59.817 11.938,59.817 ccw(c11.938,59.277) 11.398,59.277 11.398,57.721 ccw(c12.351,57.721) 12.351,56.769 21.431,56.769 21.431,59.468 ccw(c21.082,59.468)
Bottom Layer:
  region net +5: 13.081,28.702 13.081,37.973 cw(c14.605,37.973) 14.605,39.497 27.305,39.497 27.305,41.529 11.43,41.529 ccw(c11.43,40.005) 9.906,40.005 9.906,31.242 cw(c9.652,31.242) 9.652,30.988 9.525,30.988 ccw(c9.525,30.734) 9.271,30.734 9.271,28.702 ccw(c9.525,28.702) 9.525,28.448 12.827,28.448 ccw(c12.827,28.702)
  region net Vin: 1.778,22.098 20.574,22.098 ccw(c20.574,22.733) 21.209,22.733 21.209,31.877 cw(c21.59,31.877) 21.59,32.258 32.766,32.258 ccw(c32.766,32.893) 33.401,32.893 33.401,55.753 ccw(c32.893,55.753) 32.893,56.261 11.557,56.261 ccw(c11.557,55.88) 11.176,55.88 11.176,55.372 ccw(c11.557,55.372) 11.557,54.991 14.224,54.991 cw(c14.224,54.61) 14.605,54.61 14.605,52.959 ccw(c14.986,52.959) 14.986,52.578 16.383,52.578 ccw(c16.383,52.832) 16.637,52.832 16.637,53.086 cw(c17.145,53.086) 17.145,53.594 21.336,53.594 ccw(c21.336,53.848) 21.59,53.848 21.59,54.737 cw(c21.844,54.737) 21.844,54.991 30.607,54.991 cw(c30.607,54.483) 31.115,54.483 31.115,34.036 cw(c30.607,34.036) 30.607,33.528 20.066,33.528 ccw(c20.066,32.893) 19.431,32.893 19.431,24.765 cw(c18.542,24.765) 18.542,23.876 1.905,23.876 ccw(c1.905,23.368) 1.397,23.368 1.397,22.479 ccw(c1.778,22.479)
  region net GND: 1.524,25.019 18.161,25.019 ccw(c18.161,25.781) 18.923,25.781 18.923,33.655 cw(c19.939,33.655) 19.939,34.671 23.368,34.671 cw(c23.368,34.417) 23.622,34.417 23.622,34.036 ccw(c23.876,34.036) 23.876,33.782 30.099,33.782 ccw(c30.099,34.036) 30.353,34.036 30.353,34.925 30.353,35.941 ccw(c30.099,35.941) 30.099,36.195 25.019,36.195 cw(c25.019,36.703) 24.511,36.703 24.511,37.211 ccw(c23.749,37.211) 23.749,37.973 14.859,37.973 ccw(c14.859,37.211) 14.097,37.211 14.097,27.686 cw(c13.335,27.686) 13.335,26.924 9.652,26.924 cw(c9.652,27.94) 8.636,27.94 8.636,46.99 ccw(c8.001,46.99) 8.001,47.625 4.953,47.625 cw(c4.953,48.514) 4.064,48.514 4.064,49.657 cw(c4.572,49.657) 4.572,50.165 9.906,50.165 ccw(c9.906,50.927) 10.668,50.927 10.668,58.928 10.668,62.484 cw(c11.176,62.484) 11.176,62.992 21.209,62.992 cw(c21.209,61.849) 22.352,61.849 22.352,59.182 ccw(c23.114,59.182) 23.114,58.42 33.782,58.42 ccw(c33.782,58.801) 34.163,58.801 34.163,59.69 ccw(c33.782,59.69) 33.782,60.071 25.4,60.071 cw(c25.4,60.706) 24.765,60.706 24.765,67.818 ccw(c24.257,67.818) 24.257,68.326 9.017,68.326 ccw(c9.017,67.691) 8.382,67.691 8.382,51.943 2.54,51.943 ccw(c2.54,51.054) 1.651,51.054 1.651,43.561 ccw(c2.286,43.561) 2.286,42.926 4.445,42.926 cw(c4.445,42.418) 4.953,42.418 4.953,29.591 cw(c4.191,29.591) 4.191,28.829 1.524,28.829 ccw(c1.524,28.448) 1.143,28.448 1.143,25.4 ccw(c1.524,25.4)
  pour cut-out: 10.109,28.702 11.621,28.702 10.16,28.702 cw(c10.16,28.956) 10.109,28.707

## Silkscreen, mask and mechanical layers (free items; w line width, h text height)
Top Overlay:
  lines w0.2: 1.27,53.086 1.945,53.086 ; 1.524,56.769 7.62,56.769 7.62,53.086 3.389,53.086 ; 5.588,52.832 5.588,53.086 ; 6.731,56.769 6.731,57.023
  text "3V3" at 0.984,64.57 h2 r270
  text "5V0" at 3.397,64.57 h2 r270
  text "VIN" at 5.915,64.568 h2 r270
  text "+5V" at 28.035,44.25 h2 r270
  text "USB" at 28.035,40.059 h2 r270
  text ">TXD" at 40.84,39.424 h2 r270
  text "<RXD" at 43.507,39.424 h2 r270
  text "PB5" at 45.676,38.322 h2
  text "PB4" at 45.676,36.466 h2
  text "RST" at 4.518,35.606 h1.7
  text "PB3" at 45.676,33.952 h2
  text "3.3" at 4.518,32.607 h2
  text "PB2" at 45.676,31.46 h2
  text "+5" at 4.518,30.016 h2
  text "PB1" at 45.676,28.969 h2
  text "GND" at 4.518,27.386 h2
  text "PB0" at 45.676,26.455 h2
  text "GND" at 4.518,24.756 h2
  text "PD7" at 45.539,22.425 h2
  text "Vin" at 4.52,22.171 h2
  text "PD6" at 45.539,19.877 h2
  text "PC0" at 4.645,17.367 h2
  text "PD5" at 45.539,17.335 h2
  text "PC1" at 4.645,14.827 h2
  text "PD4" at 45.539,14.678 h2
  text "PC2" at 4.645,12.287 h2
  text "PD3" at 45.539,12.267 h2
  text "MKII" at 23.568,10.106 h2
  text "PC3" at 4.645,9.747 h2
  text "PD2" at 45.539,9.741 h2
  text "PC4" at 4.645,7.207 h2
  text "PD1" at 45.539,7.215 h2
  text "RESET" at 10.065,4.772 h2 r90
  text "PC5" at 4.645,4.667 h2
  text "PD0" at 45.539,4.667 h2
Bottom Overlay:
  text "ATMEGA328 / eBoard V1.1" at 23.749,17.653 h2.5
  text "github.com/aKaReZa75" at 23.549,16.197 h2

## Text inside footprints (layer, text, board x,y; h text height)
J3: Mechanical 13 "PCB EDGE" at 30.734,68.529 h0.61 r180
P2: Top Overlay "2" at 20.015,6.198 h1; Top Overlay "1" at 20.295,3.531 h1